# EAGLE board Control (EAGLE 7.6.0)
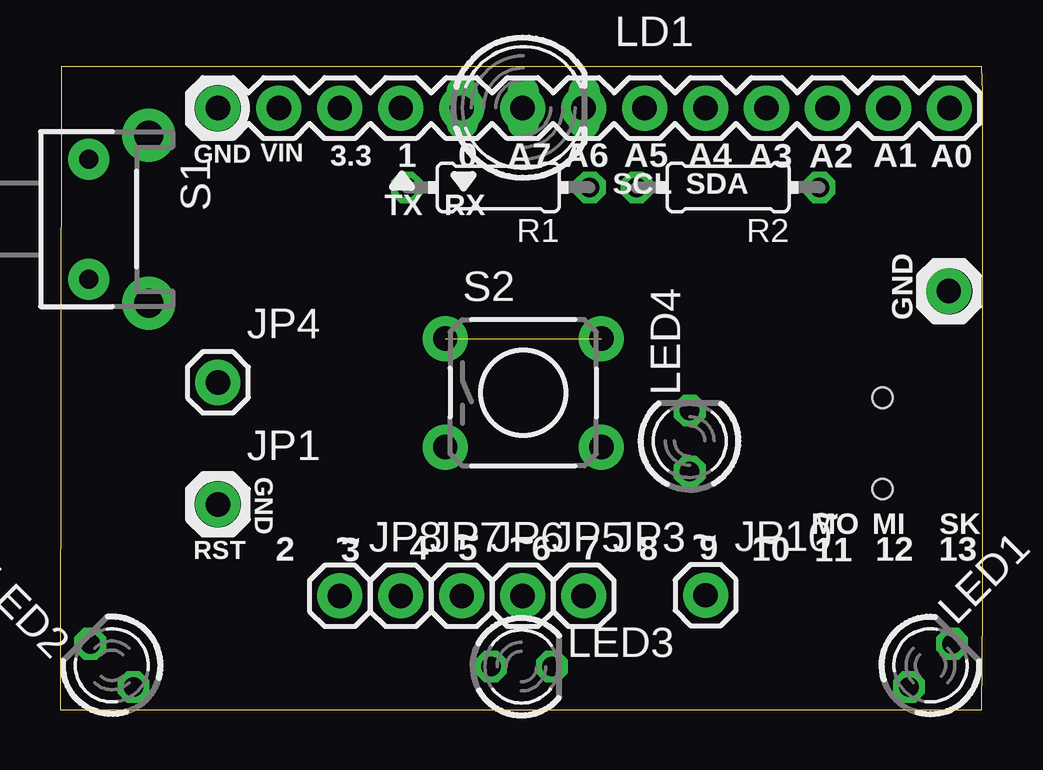
[diagram p0: board, top side]
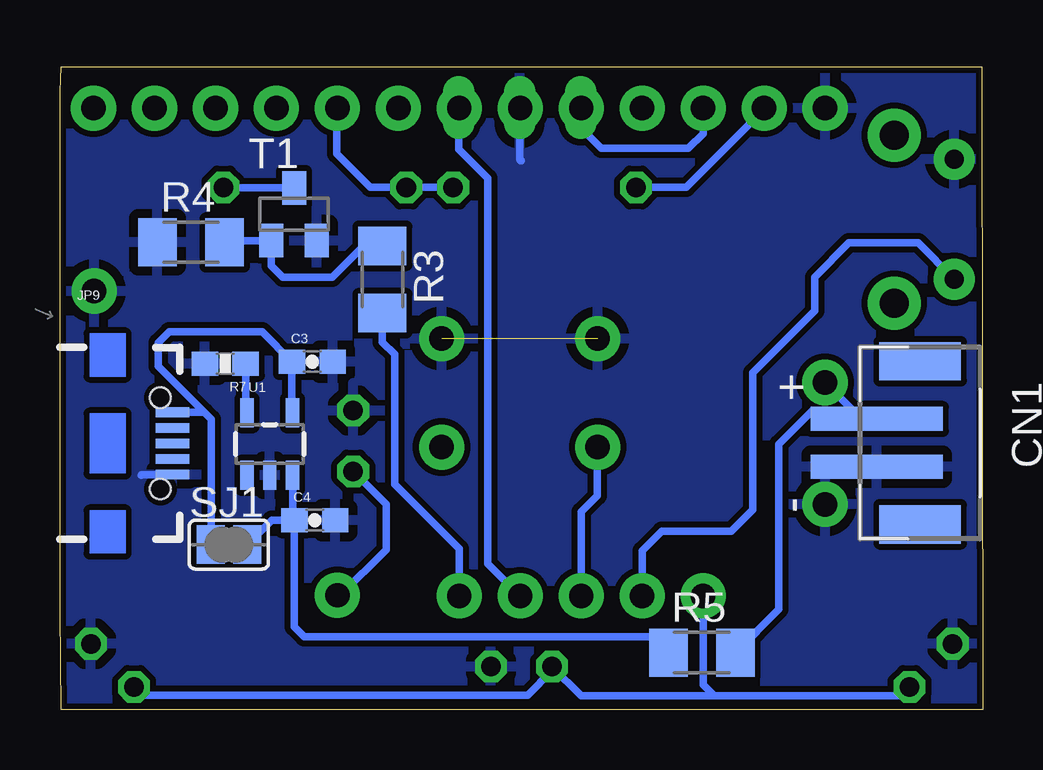
[diagram p1: board, bottom side, seen from below]

Size 38.46 x 26.8 mm. Coordinates in mm from the lower left corner, seen from the top.
Outline: 0,0 38.4,0 38.46,4.06 38.46,25.76 38.4,26.8 0.05,26.8 0,0
Copper layers (1*16): Top 0.035mm / dielectric 1.5mm / Bottom 0.035mm
Design rules "ITEADstudio_DRC *": minimum track width 6mil, minimum drill 12mil, track to track 6mil, track to pad 6mil, pad to pad 6mil, via to via 6mil, smd to smd 0mil, copper to edge 10mil, drill to drill 10mil, minimum pad ring 10mil, minimum via ring 6mil, stop-mask expansion 2mil, vias tented up to drill 100mil, thermal gap 15mil
Net classes: 1 power: width 0.381 mm, clearance 0.254 mm

## Footprints (pad centres in the part's own frame; a part is rotated, then mirrored left to right if it is on the bottom)
1X13 = drill 1.016 pad 1.88: 1 0,0; 2 2.54,0; 3 5.08,0; 4 7.62,0; 5 10.16,0; 6 12.7,0; 7 15.24,0; 8 17.78,0; 9 20.32,0; 10 22.86,0; 11 25.4,0; 12 27.94,0; 13 30.48,0
0603-CAP = smd 1.1 x 1: 1 -0.85,0; 2 0.85,0
JST-PH-2-SMT = smd 1 x 5.5: 1 -1,-1.8; 2 1,-1.8 | smd 1.6 x 3.4: NC1 -3.4,0; NC2 3.4,0
1X01 = drill 1.016 pad 1.88: 1 0,0
USB-AB-MICRO-SMD_V03 = smd 1.4 x 0.4: D+1 2.7,0; D-1 2.7,0.65; GND1 2.7,-1.3; ID1 2.7,-0.65; VBUS1 2.7,1.3 | hole 0.85: 2.2,1.9; 2.2,-1.9
DUOLED-A-5MM = drill 0.813 long: A 0,0; CR 2.54,0; CX -2.54,0
LED3MM = drill 0.813 octagon: A -1.27,0; K 1.27,0
0204/7 = drill 0.813 octagon: 1 -3.81,0; 2 3.81,0
M1206 = smd 1.6 x 2: 1 -1.4,0; 2 1.4,0
0603-RES = smd 1.1 x 1: 1 -0.85,0; 2 0.85,0
TACTILE-PTH-SIDEEZ = drill 0.8 pad 1.7: 1 -2.5,0; 2 2.5,0 | drill 1.2 pad 2.2: ANCHOR1 -3.5,2.5; ANCHOR2 3.5,2.5
TACTILE-PTH = drill 1.016 pad 1.88: 1 -3.251,2.261; 2 3.251,2.261; 3 -3.251,-2.261; 4 3.251,-2.261
SJ = smd 1.168 x 1.6: 1 -0.762,0; 2 0.762,0
SOT23 = smd 1 x 1.4: 1 -0.95,-1.1; 2 0.95,-1.1; 3 0,1.1
SOT23-5 = smd 0.55 x 1.2: 1 -0.95,-1.3; 2 0,-1.3; 3 0.95,-1.3; 4 0.95,1.3; 5 -0.95,1.3

## Placement (x,y rotation side)
ANALOGSIDE  M13  [1X13]  37.06,25.07 180 top
C3  4.7uF  [0603-CAP]  27.94,14.5 0 bottom
C4  4.7uF  [0603-CAP]  27.84,7.9 0 bottom
CN1  [JST-PH-2-SMT]  2.62,11.13 270 bottom
JP1  M01PTH  [1X01]  6.58,8.56 0 top
JP2  M01PTH  [1X01]  37.03,17.45 0 top
JP3  M01PTH  [1X01]  21.82,4.75 0 top
JP4  M01PTH  [1X01]  6.58,13.64 0 top
JP5  M01PTH  [1X01]  19.28,4.75 0 top
JP6  M01PTH  [1X01]  16.74,4.75 0 top
JP7  M01PTH  [1X01]  14.2,4.75 0 top
JP8  M01PTH  [1X01]  11.66,4.75 0 top
JP9  Micro USB  [USB-AB-MICRO-SMD_V03]  36.47,11.1 0 bottom
JP10  M01PTH  [1X01]  26.9,4.78 0 top
LD1  [DUOLED-A-5MM]  19.3,25.1 0 top
LED1  [LED3MM]  36.27,1.85 45 top
LED2  [LED3MM]  2.16,1.85 135 top
LED3  [LED3MM]  19.23,1.8 0 top
LED4  [LED3MM]  26.24,11.2 90 top
R1  [0204/7]  18.26,21.77 180 top
R2  [0204/7]  27.84,21.77 180 top
R3  [M1206]  25.02,17.93 270 bottom
R4  [M1206]  32.99,19.48 0 bottom
R5  [M1206]  11.71,2.39 0 bottom
R7  2.0k  [0603-RES]  31.57,14.43 180 bottom
S1  SWITCH-MOMENTARY-2SIDE_EZ  [TACTILE-PTH-SIDEEZ]  1.19,20.45 270 top
S2  [TACTILE-PTH]  19.3,13.21 0 top
SJ1  [SJ]  31.42,6.88 0 bottom
T1  BC850  [SOT23]  28.7,20.65 0 bottom
U1  MCP73831  [SOT23-5]  29.72,11.07 0 bottom

## Library data of the parts
ANALOGSIDE JP1-JP8 JP10 = SparkFun-Connectors
C3 C4 = SparkFun-Capacitors; PROD_ID: CAP-08280
CN1 = adafruit
JP9 = SparkFun-Connectors; PROD_ID: CONN-11794
LD1 LED1-LED4 = led
R1-R5 = rcl
R7 = SparkFun-Resistors; PROD_ID: RES-08296
S1 = SparkFun-Electromechanical
S2 = SparkFun-Retired
SJ1 = jumper
T1 = transistor
U1 = SparkFun-PowerIC; PROD_ID: IC-09995

## Nets
AGND [power]: CN1.2 JP1.1 LED2.K
GND [power]: ANALOGSIDE.13 C3.2 C4.2 JP2.1 JP9.GND1 LD1.A LED1.K LED3.K LED4.K R4.1 R7.2 S1.1 S2.1 S2.2 T1.2 U1.2
N$1: JP7.1 S1.2
N$2: JP8.1 LED1.A LED2.A LED3.A
N$3: JP6.1 S2.3
N$4: JP5.1 LD1.CR
N$5: C3.1 JP9.VBUS1 SJ1.1 U1.4
N$6: ANALOGSIDE.5 R1.1 R2.2
N$7: C4.1 R5.1 SJ1.2 U1.3
N$8: ANALOGSIDE.12 R1.2
N$9: JP3.1 R3.2
N$10: R2.1 T1.3
N$11: R3.1 R4.2 T1.1
N$12: ANALOGSIDE.11 LD1.CX
N$13: JP10.1 LED4.A
PROG: R7.1 U1.5
VCC: CN1.1 JP4.1 R5.2

## Tracks (layer width: path | path; a pad name or v marks a point on that pad's centre or on a via)
AGND
  pour Bottom: 4.9,26.62 38.38,26.62 38.38,0.18 0.13,0.05 0.18,26.52
GND  (1 unrouted)
  Bottom 0.305: JP9.GND1 35.06,9.8 35.08,9.78 | LD1.A 19.3,22.94 19.25,22.89 19.23,22.89
  pour Bottom: 0.15,26.54 38.3,26.7 38.35,0.18 0.2,0.03
N$1
  Bottom 0.305: JP7.1 14.2,6.63 13.39,7.44 10.49,7.44 9.6,8.33 9.6,14.05 7.01,16.64 7.01,18.03 5.59,19.46 2.7,19.46 S1.2
N$2
  Bottom 0.305: LED1.A 35.03,0.61 18.97,0.61 17.96,1.63 LED3.A 16.74,0.58 11.2,0.58 | LED2.A 3.43,0.58 11.2,0.58 | 11.2,0.58 11.66,1.04 JP8.1
N$3
  Bottom 0.305: JP6.1 16.74,8.25 16.08,8.92 16.08,10.92 S2.3
N$4
  Bottom 0.305: LD1.CR 21.84,23.37 20.62,22.15 20.62,6.1 JP5.1
N$5
  Bottom 0.305: U1.4 28.79,12.4 C3.1 30.03,15.75 33.91,15.75 34.37,15.29 34.37,14.33 32.44,12.4 | JP9.VBUS1 32.44,12.4 | 32.44,12.4 32.16,12.12 32.16,7.65 SJ1.1
N$6
  Bottom 0.305: R1.1 R2.2 25.53,21.77 26.92,23.16 26.92,25.04 ANALOGSIDE.5
N$7
  Bottom 0.305: R5.1 13.77,3.05 28.27,3.05 28.69,3.47 C4.1 | U1.3 28.77,7.98 C4.1 | C4.1 29.64,7.9 SJ1.2
N$8
  Bottom 0.305: ANALOGSIDE.12 9.12,25.02 12.37,21.77 R1.2
N$9
  Bottom 0.305: JP3.1 21.82,6.71 24.51,9.4 24.51,14.81 25.02,15.32 R3.2
N$10
  Bottom 0.305: T1.3 31.63,21.75 R2.1
N$11
  Bottom 0.305: R4.2 31.53,19.55 T1.1 29.65,18.5 29.18,18.03 27.1,18.03 25.86,19.28 25.07,19.28 R3.1
N$12
  Bottom 0.305: ANALOGSIDE.11 11.66,24 12.27,23.39 15.9,23.39 16.66,24.16 16.66,24.99 LD1.CX
N$13
  Bottom 0.305: JP10.1 26.77,4.78 24.87,6.68 24.87,8.56 LED4.A
PROG
  Bottom 0.305: R7.1 30.72,12.43 U1.5
VCC
  Bottom 0.305: CN1.1 5.06,12.13 5.41,12.47 | 5.41,12.47 JP4.1 | R5.2 8.51,4.19 8.51,11.07 7.11,12.47 5.41,12.47

## Text on the board
_tsilk: VIN | 3.3 | 1 | 0 | A7 | A6 | A5 | A4 | A3 | A2 | A1 | GND | A0 | TX | RX | SCL | SDA | GND | GND | 2 | 3 | 4 | ~ | 5 | 6 | 7 | 8 | ~ | 9 | 10 | MO | ~ | 11 | MI | 12 | SK | 13 | RST | ~ | ~ | ~